# EAGLE board me333-1 (EAGLE 9.6.2)
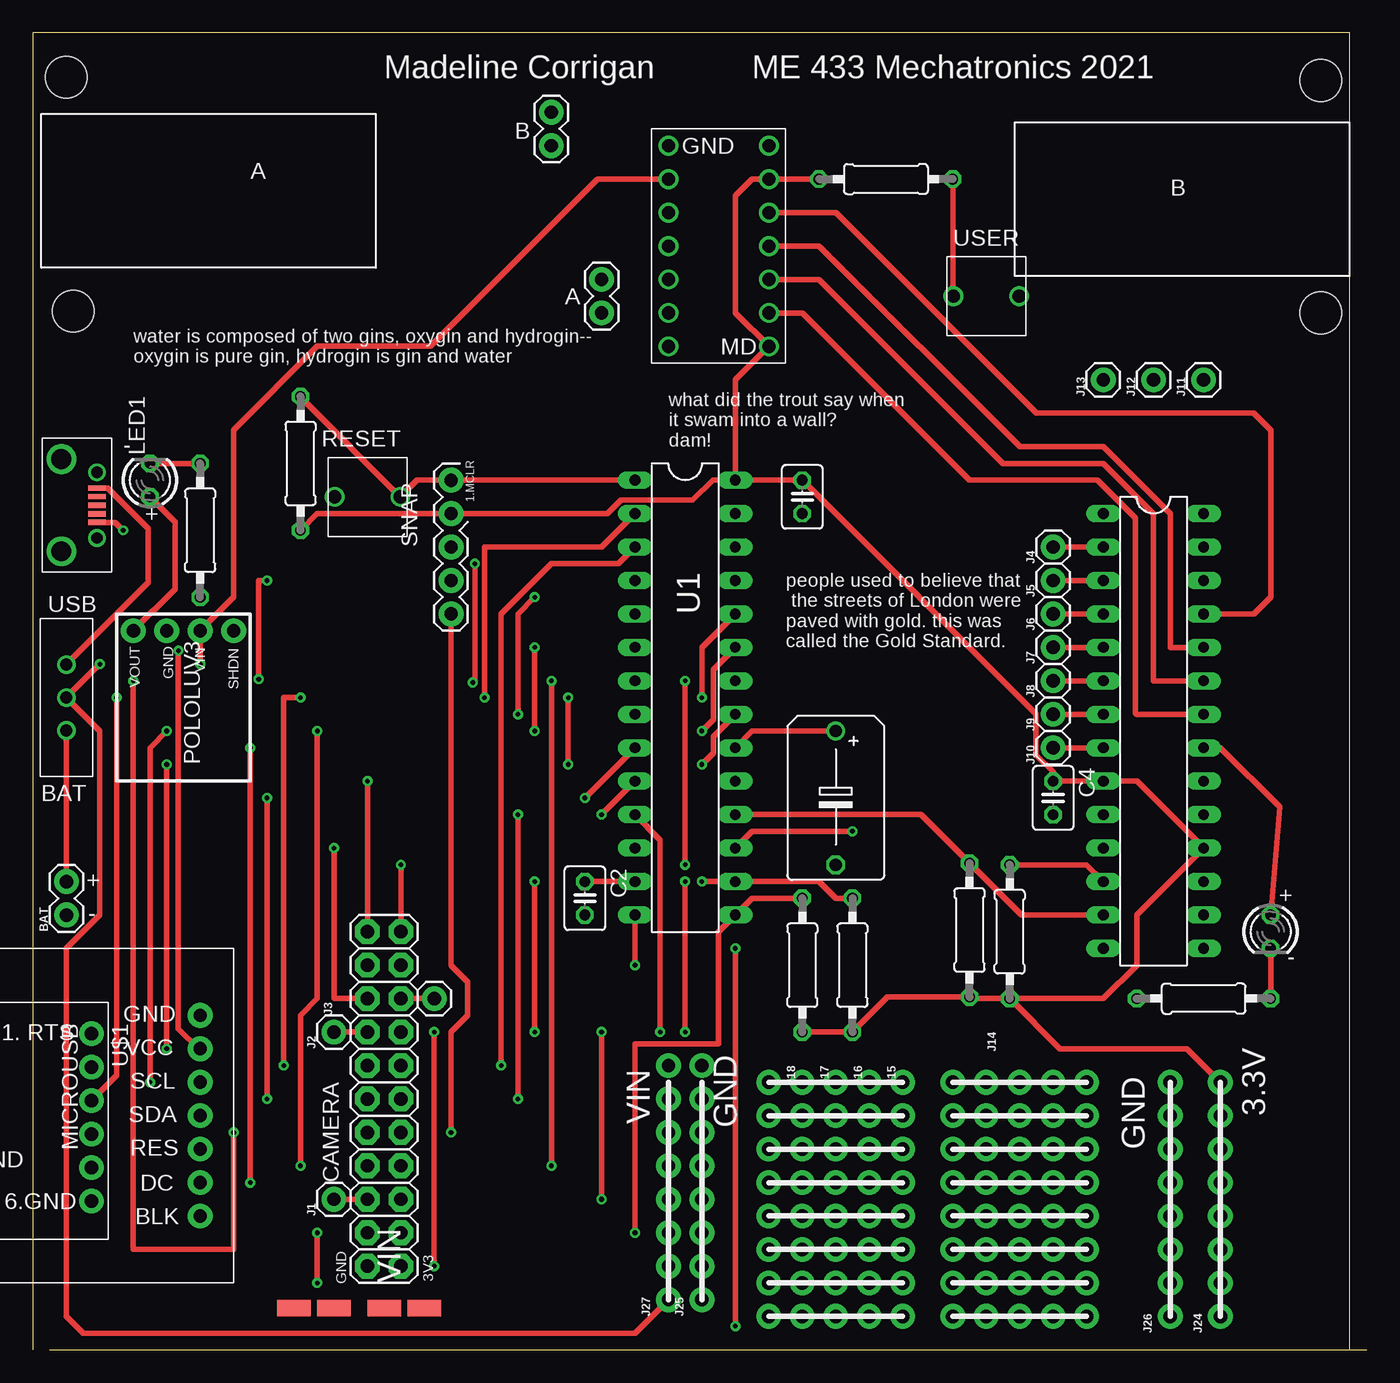
[diagram p0: board, top side]
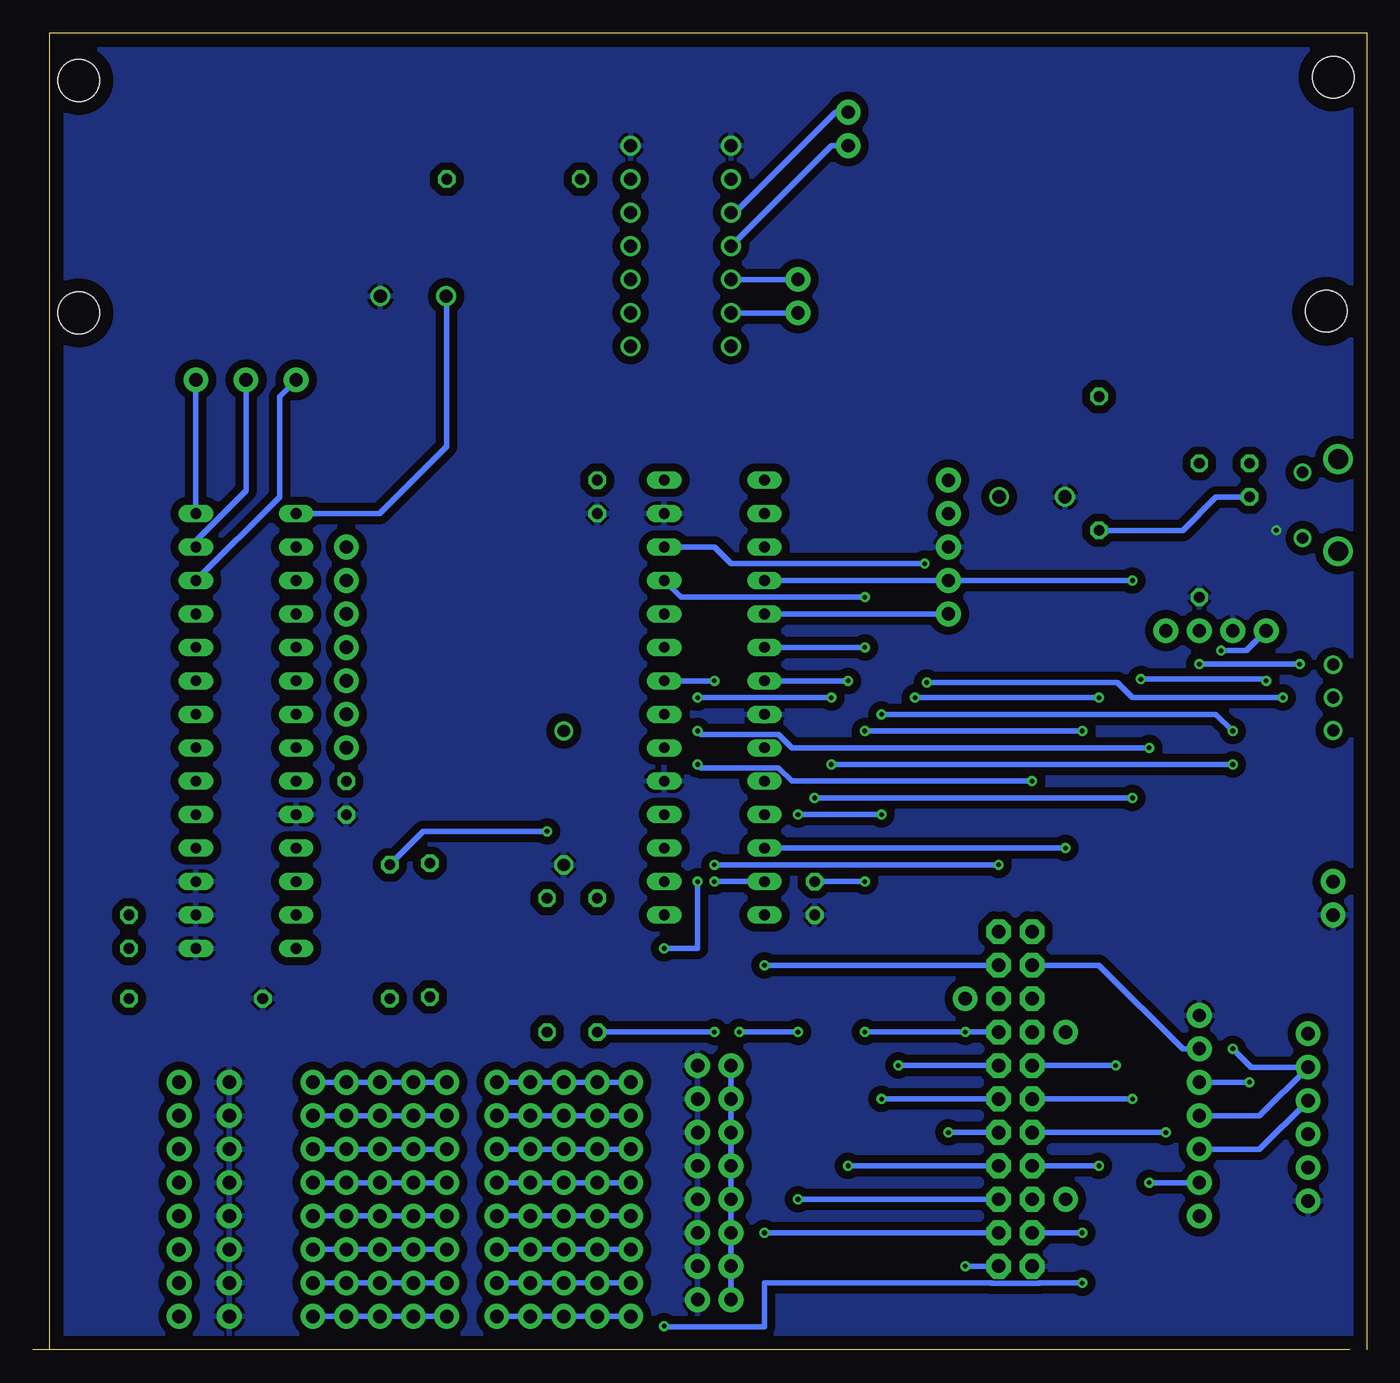
[diagram p1: board, bottom side, seen from below]

Size 101.27 x 100 mm. Coordinates in mm from the lower left corner, seen from the top.
Outline: 100,0 100,100 0,100 0,0
Outline: 1.27,0 101.27,0
Copper layers (1*16): Top 0.035mm / dielectric 0.15mm / Bottom 0.035mm
Design rules "default": minimum track width 6mil, minimum drill 0.35mm, track to track 6mil, track to pad 6mil, pad to pad 6mil, via to via 6mil, smd to smd 6mil, copper to edge 40mil, drill to drill 6mil, minimum pad ring 10mil, minimum via ring 8mil, stop-mask expansion 4mil, vias tented up to drill 0mil, thermal gap 10mil
Holes 3.17 mm at 2.54,96.65 3.05,78.87 97.79,96.39 97.79,78.74

## Footprints (pad centres in the part's own frame; a part is rotated, then mirrored left to right if it is on the bottom)
1X02 = drill 1.016 pad 1.88: 1 0,0; 2 2.54,0
C025-030X050 = drill 0.813 octagon: 1 -1.27,0; 2 1.27,0
B45181C = drill 0.914: + -5.08,0 | drill 0.914 octagon: - 5.08,0
1X01 = drill 1.016 pad 1.88: 1 0,0
1X08 = drill 1.016 pad 1.88: 1 0,0; 2 2.54,0; 3 5.08,0; 4 7.62,0; 5 10.16,0; 6 12.7,0; 7 15.24,0; 8 17.78,0
LED3MM = drill 0.813 octagon: A -1.27,0; K 1.27,0
0207/10 = drill 0.813 octagon: 1 -5.08,0; 2 5.08,0
PUSH = drill 1: 1 -2.5,0; 2 2.5,0
DIL28-3 = drill 0.813 long: 1 -16.51,-3.81; 2 -13.97,-3.81; 3 -11.43,-3.81; 4 -8.89,-3.81; 5 -6.35,-3.81; 6 -3.81,-3.81; 7 -1.27,-3.81; 8 1.27,-3.81; 9 3.81,-3.81; 10 6.35,-3.81; 11 8.89,-3.81; 12 11.43,-3.81; 13 13.97,-3.81; 14 16.51,-3.81; 15 16.51,3.81; 16 13.97,3.81; 17 11.43,3.81; 18 8.89,3.81; 19 6.35,3.81; 20 3.81,3.81; 21 1.27,3.81; 22 -1.27,3.81; 23 -3.81,3.81; 24 -6.35,3.81; 25 -8.89,3.81; 26 -11.43,3.81; 27 -13.97,3.81; 28 -16.51,3.81
MICROUSB = smd 0.4 x 1.35: 1.VBUS -1.3,2.7; 2 -0.65,2.7; 3 0,2.7; 4 0.65,2.7; 5.GND 1.3,2.7 | drill 0.85: P$1 -2.5,2.7; P$7 2.5,2.7 | drill 1.5: P$8 -3.5,0; P$9 3.5,0
SLIDE = drill 0.9: 1 -2.5,0; 2 0,0; 3 2.5,0
POLOLUV3 = drill 1.016 pad 1.88: 1 0,3.81; 2 0,1.27; 3 0,-1.27; 4 0,-3.81
SNAP = drill 1.016 pad 1.88: 1 0,5.08; 2 0,2.54; 3 0,0; 4 0,-2.54; 5 0,-5.08
HBRIDGE-8835 = drill 1: P$1 -3.81,7.62; P$2 -3.81,5.08; P$3 -3.81,2.54; P$4 -3.81,0; P$5 -3.81,-2.54; P$6 -3.81,-5.08; P$7 -3.81,-7.62; P$8 3.81,-7.62; P$9 3.81,-5.08; P$10 3.81,-2.54; P$11 3.81,0; P$12 3.81,2.54; P$13 3.81,5.08; P$14 3.81,7.62
USB-UART-FRIEND = drill 1.016 pad 1.88: 1.RTS -1.27,7.62; 2 -1.27,5.08; 3 -1.27,2.54; 4 -1.27,0; 5 -1.27,-2.54; 6 -1.27,-5.08
LCD-DISP = drill 1.016 pad 1.88: 1 0,7.62; 2 0,5.08; 3 0,2.54; 4 0,0; 5 0,-2.54; 6 0,-5.08; 7 0,-7.62
IO-EXPANDER = drill 0.813 long: 1 -11.43,-2.54; 2 -8.89,-2.54; 3 -6.35,-2.54; 4 -3.81,-2.54; 5 -1.27,-2.54; 6 1.27,-2.54; 7 3.81,-2.54; 8 6.35,-2.54; 9 8.89,-2.54; 10 11.43,-2.54; 11 13.97,-2.54; 12 16.51,-2.54; 13 19.05,-2.54; 14 21.59,-2.54; 15 21.59,5.08; 16 19.05,5.08; 17 16.51,5.08; 18 13.97,5.08; 19 11.43,5.08; 20 8.89,5.08; 21 6.35,5.08; 22 3.81,5.08; 23 1.27,5.08; 24 -1.27,5.08; 25 -3.81,5.08; 26 -6.35,5.08; 27 -8.89,5.08; 28 -11.43,5.08
CAMERA = drill 1.016 pad 1.88 octagon: 1 -1.27,11.43; 2 -1.27,8.89; 3 -1.27,6.35; 4 -1.27,3.81; 5 -1.27,1.27; 6 -1.27,-1.27; 7 -1.27,-3.81; 8 -1.27,-6.35; 9 -1.27,-8.89; 10 -1.27,-11.43; 11 -1.27,-13.97; 12 1.27,-13.97; 13 1.27,-11.43; 14 1.27,-8.89; 15 1.27,-6.35; 16 1.27,-3.81; 17 1.27,-1.27; 18 1.27,1.27; 19 1.27,3.81; 20 1.27,6.35; 21 1.27,8.89; 22 1.27,11.43 | smd 2.54 x 1.27: P$1 -3.048,14.605; P$2 0,14.605; P$3 3.81,14.605; P$4 6.858,14.605

## Placement (x,y rotation side)
A  [1X02]  43.18,78.74 90 top
B  [1X02]  39.37,91.44 90 top
BAT  [1X02]  2.54,33.02 90 top
C1  0.1uF  [C025-030X050]  58.42,64.77 270 top
C2  0.1uF  [C025-030X050]  41.91,34.29 270 top
C3  10uF  [B45181C]  60.96,41.91 270 top
C4  0.1uF  [C025-030X050]  77.47,41.91 270 top
J1  href  [1X01]  22.86,11.43 90 top
J2  pwdn  [1X01]  22.86,24.13 90 top
J3  str  [1X01]  30.48,26.67 90 top
J4  [1X01]  77.47,60.96 90 top
J5  [1X01]  77.47,58.42 90 top
J6  [1X01]  77.47,55.88 90 top
J7  [1X01]  77.47,53.34 90 top
J8  [1X01]  77.47,50.8 90 top
J9  [1X01]  77.47,48.26 90 top
J10  [1X01]  77.47,45.72 90 top
J11  [1X01]  88.9,73.66 90 top
J12  [1X01]  85.09,73.66 90 top
J13  [1X01]  81.28,73.66 90 top
J14  [1X08]  66.04,20.32 270 top
J15  [1X08]  63.5,20.32 270 top
J16  [1X08]  60.96,20.32 270 top
J17  [1X08]  58.42,20.32 270 top
J18  [1X08]  55.88,20.32 270 top
J19  [1X08]  69.85,2.54 90 top
J20  [1X08]  72.39,2.54 90 top
J21  [1X08]  74.93,2.54 90 top
J22  [1X08]  77.47,2.54 90 top
J23  [1X08]  80.01,2.54 90 top
J24  [1X08]  90.17,2.54 90 top
J25  [1X08]  50.8,3.81 90 top
J26  [1X08]  86.36,2.54 90 top
J27  [1X08]  48.26,3.81 90 top
LED1  RED  [LED3MM]  8.89,66.04 90 top
LED2  RED  [LED3MM]  93.98,31.75 270 top
R1  330  [0207/10]  12.7,62.23 90 top
R2  10k  [0207/10]  20.32,67.31 270 top
R3  10k  [0207/10]  74.17,31.75 90 top
R4  10k  [0207/10]  71.12,31.88 90 top
R5  330  [0207/10]  88.9,26.67 0 top
R6  10k  [0207/10]  64.77,88.9 180 top
R7  4.7k  [0207/10]  58.42,29.21 90 top
R8  4.7k  [0207/10]  62.23,29.21 90 top
RESET  PUSH  [PUSH]  25.4,64.77 180 top
U1  PIX32MX170F256B  [DIL28-3]  49.53,49.53 270 top
U$1  MICROUSB  [MICROUSB]  2.16,64.14 270 top
U$2  SLIDE  [SLIDE]  2.54,49.53 270 top
U$3  POLOLUV3  [POLOLUV3]  11.43,54.61 90 top
U$4  SNAP  [SNAP]  31.75,60.96 0 top
U$5  HBRIDGE-8835  [HBRIDGE-8835]  52.07,83.82 0 top
U$6  USB-UART-FRIEND  [USB-UART-FRIEND]  5.71,16.38 0 top
U$7  LCD-DISP  [LCD-DISP]  12.7,17.78 0 top
U$8  IO-EXPANDER  [IO-EXPANDER]  83.82,52.07 270 top
U$9  CAMERA  [CAMERA]  26.67,17.78 180 top
USER  PUSH  [PUSH]  72.39,80.01 0 top

## Library data of the parts
A B BAT J1-J13 LED1 LED2 RESET U1 U$1-U$9 USER = ME433lib
C1-C4 = ME433lib; SPICEPREFIX: C
J14-J27 = ME433lib; PROD_ID: CONN-08438
R1-R8 = ME433lib; SPICEPREFIX: R

## Nets
+3V3: C1.1 C2.1 C4.1 J24.1 J24.2 J24.3 J24.4 J24.5 J24.6 J24.7 J24.8 LED1.A R2.2 R3.1 R4.1 R6.2 R7.1 R8.1 U1.13 U1.28 U$3.1 U$4.2 U$5.P$8 U$5.P$13 U$7.2 U$8.9 U$8.18 U$9.1 U$9.8 U$9.13
+5V: U$1.1.VBUS U$2.1
ADIR: U$5.P$9 U$8.22
APWM: U$5.P$10 U$8.23
B0-PGD-D4: U1.4 U$4.4 U$9.18
B1-PGC-D5: U1.5 U$4.5 U$9.5
B6: R7.2 U1.15 U$9.2
B7: R8.2 U1.16 U$9.21
B8: R3.2 U1.17 U$8.12
B9: R4.2 U1.18 U$8.13
B12: U1.23 U$7.6
B13: U1.24 U$6.2 U$7.4
B14: U1.25 U$7.3
B15: U1.26 U$6.3 U$7.5
BDIR: U$5.P$11 U$8.24
BPWM: U$5.P$12 U$8.25
D0: U1.2 U$9.16
D1: U1.3 U$9.7
D2: U1.9 U$9.17
D3: U1.10 U$9.6
D6: U1.6 U$9.19
D7: U1.7 U$9.4
GND: BAT.1 C1.2 C2.2 C3.- C4.2 J25.1 J25.2 J25.3 J25.4 J25.5 J25.6 J25.7 J25.8 J26.1 J26.2 J26.3 J26.4 J26.5 J26.6 J26.7 J26.8 R1.1 R5.1 RESET.2 U1.8 U1.19 U1.27 U$1.5.GND U$3.2 U$4.3 U$5.P$1 U$5.P$14 U$6.6 U$7.1 U$8.10 U$8.15 U$8.16 U$8.17 U$9.22 USER.2
MCLR: R2.1 RESET.1 U1.1 U$4.1
MCLR1: R6.1 U$8.1 USER.1
N$1: LED1.K R1.2
N$2: C3.+ U1.20
N$3: LED2.K R5.2
N$4: B.2 U$5.P$3
N$5: B.1 U$5.P$4
N$6: LED2.A U$8.21
N$8: A.2 U$5.P$5
N$9: A.1 U$5.P$6
N$10: J3.1 U$9.9
N$11: J2.1 U$9.15
N$12: J1.1 U$9.20
N$13: J4.1 U$8.2
N$14: J5.1 U$8.3
N$15: J6.1 U$8.4
N$16: J7.1 U$8.5
N$17: J8.1 U$8.6
N$18: J9.1 U$8.7
N$19: J10.1 U$8.8
N$20: J11.1 U$8.28
N$21: J12.1 U$8.27
N$22: J13.1 U$8.26
N$23: J14.8 J15.8 J16.8 J17.8 J18.8
N$24: J14.7 J15.7 J16.7 J17.7 J18.7
N$25: J14.6 J15.6 J16.6 J17.6 J18.6
N$26: J14.5 J15.5 J16.5 J17.5 J18.5
N$27: J14.4 J15.4 J16.4 J17.4 J18.4
N$28: J14.3 J15.3 J16.3 J17.3 J18.3
N$29: J14.2 J15.2 J16.2 J17.2 J18.2
N$30: J14.1 J15.1 J16.1 J17.1 J18.1
N$31: J19.8 J20.8 J21.8 J22.8 J23.8
N$32: J19.7 J20.7 J21.7 J22.7 J23.7
N$33: J19.6 J20.6 J21.6 J22.6 J23.6
N$34: J19.5 J20.5 J21.5 J22.5 J23.5
N$35: J19.4 J20.4 J21.4 J22.4 J23.4
N$36: J19.3 J20.3 J21.3 J22.3 J23.3
N$37: J19.2 J20.2 J21.2 J22.2 J23.2
N$38: J19.1 J20.1 J21.1 J22.1 J23.1
RCK: U1.12 U$9.14
RRST: U1.21 U$9.12
V+: BAT.2 U$2.3
VIN: J27.1 J27.2 J27.3 J27.4 J27.5 J27.6 J27.7 J27.8 U$2.2 U$3.3 U$5.P$2
VSY: U1.11 U$9.3
WR: U1.14 U$9.10
WRST: U1.22 U$9.11

## Tracks (layer width: path | path; a pad name or v marks a point on that pad's centre or on a via)
+3V3  (via drill 0.35)
  Top 0.406: R2.2 21.59,63.5 U$4.2 43.62,63.5 44.64,64.52 50.1,64.52 51.63,66.04 U1.28 | U1.28 C1.1 76.17,48.28 76.17,45.18 77.47,43.89 C4.1 U$8.9 83.82,43.18 U$8.18 83.82,33.02 83.82,29.21 81.28,26.67 R3.1 | U1.28 53.34,73.66 U$5.P$8 53.34,78.74 53.34,87.63 54.61,88.9 U$5.P$13 R6.2 | R3.1 77.98,22.86 87.63,22.86 J24.8 J24.7 J24.6 J24.5 J24.4 J24.3 J24.2 J24.1 | R7.1 R8.1 64.9,26.8 R4.1 71.25,26.67 R3.1 | v49.53,24.13 v49.53,35.56 | U$3.1 10.79,57.78 10.79,62.87 LED1.A | v30.48,24.13 v30.48,6.35 | v38.1,24.13 v38.1,35.56 | U$7.2 12.57,22.86 11.05,24.38 v11.05,53.09 | C2.1 U1.13
  Bottom 0.406: R2.2 | R2.2 13.97,62.23 11.43,64.77 LED1.A | R7.1 v49.53,24.13 | U$7.2 13.97,22.86 20.32,29.21 U$9.13 | U$9.8 v30.48,24.13 v38.1,24.13 | v30.48,6.35 U$9.1 | v38.1,35.56 C2.1 | v11.05,53.09 9.14,53.09 U$3.1 | U1.13 v49.53,35.56
+5V
  Top 0.406: U$2.1 8.76,58.25 8.76,62.36 5.68,65.44 U$1.1.VBUS
ADIR
  Top 0.406: U$8.22 83.82,48.26 83.72,48.36 83.72,63.16 80.84,66.04 71.12,66.04 58.42,78.74 U$5.P$9
APWM
  Top 0.406: U$8.23 85.09,50.8 85.09,63.5 81.28,67.31 73.66,67.31 59.69,81.28 U$5.P$10
B0-PGD-D4  (via drill 0.35)
  Top 0.406: v17.14,50.93 17.14,58.42 v17.78,58.42 | v7.62,50.8 7.62,7.62 15.24,7.62 v15.24,16.51
  Bottom 0.406: U1.4 U$4.4 v17.78,58.42 | v17.14,50.93 7.75,50.93 v7.62,50.8 | v15.24,16.51 U$9.18
B1-PGC-D5  (via drill 0.35)
  Top 0.406: v31.75,16.51 31.75,24.13 33.02,25.4 33.02,27.94 31.75,29.21 U$4.5
  Bottom 0.406: U$4.5 U1.5 | v31.75,16.51 U$9.5
B6  (via drill 0.35)
  Top 0.406: R7.2 54.61,34.29 U1.15 52.07,31.75 52.07,23.24 45.72,23.24 v45.72,8.89
  Bottom 0.406: U$9.2 v45.72,8.89
B7  (via drill 0.35)
  Top 0.406: R8.2 60.96,34.29 59.69,35.56 U1.16 v50.8,35.56 | v21.59,8.89 v21.59,5.08 | v53.34,1.8 v53.34,30.48
  Bottom 0.406: U$9.21 v21.59,8.89 | v21.59,5.08 24.84,5.08 24.86,5.05 28.48,5.05 28.5,5.08 45.72,5.08 45.72,1.75 53.29,1.75 v53.34,1.8 | v53.34,30.48 50.8,30.48 v50.8,35.56
B8  (via drill 0.35)
  Top 0.406: R3.2 80.01,36.83 U$8.12 | U1.17 54.61,39.37 v62.23,39.37
  Bottom 0.406: R3.2 71.63,39.37 v62.23,39.37
B9
  Top 0.406: U$8.13 75.06,33.02 R4.2 67.44,40.64 U1.18
B12  (via drill 0.35)
  Top 0.406: v16.51,12.7 v16.51,45.72 | v50.8,46.99 51.66,47.85 51.66,51.66 U1.23
  Bottom 0.406: U$7.6 v16.51,12.7 | v16.51,45.72 43.62,45.72 44.64,46.74 50.55,46.74 v50.8,46.99
B13  (via drill 0.35)
  Top 0.406: U1.24 50.8,53.34 v50.8,49.53 | v40.64,49.53 v40.64,44.45 | v10.16,44.45 v10.16,22.86
  Bottom 0.406: U$7.4 8.13,17.78 U$6.2 8.76,21.46 v10.16,22.86 | v50.8,49.53 v40.64,49.53 | v40.64,44.45 v10.16,44.45
B14  (via drill 0.35)
  Top 0.406: v38.1,57.15 36.83,55.88 v36.83,48.26 | v10.16,46.99 8.89,45.72 v8.89,20.32
  Bottom 0.406: U1.25 52.07,57.15 v38.1,57.15 | v36.83,48.26 11.43,48.26 v10.16,46.99 | v8.89,20.32 U$7.3
B15  (via drill 0.35)
  Top 0.406: v33.56,59.69 33.56,50.67 v33.4,50.67 | v6.35,49.53 6.35,20.83 U$6.3
  Bottom 0.406: U$7.5 8.13,15.24 U$6.3 | U1.26 49.53,60.96 48.26,59.69 v33.56,59.69 | v33.4,50.67 18.92,50.67 17.78,49.53 v6.35,49.53
BDIR
  Top 0.406: U$8.24 86.36,53.34 86.36,63.5 81.28,68.58 74.93,68.58 59.69,83.82 U$5.P$11
BPWM
  Top 0.406: U$8.25 92.71,55.88 93.98,57.15 93.98,69.85 92.71,71.12 76.2,71.12 60.96,86.36 U$5.P$12
D0  (via drill 0.35)
  Top 0.406: U1.2 43.18,60.96 34.29,60.96 v34.29,49.53 | v19.05,21.59 19.05,49.53 v20.32,49.53
  Bottom 0.406: U$9.16 v19.05,21.59 | v34.29,49.53 v20.32,49.53
D1  (via drill 0.35)
  Top 0.406: U1.3 44.45,59.69 39.37,59.69 35.56,55.88 v35.56,21.59
  Bottom 0.406: U$9.7 v35.56,21.59
D2  (via drill 0.35)
  Top 0.406: v17.78,19.05 v17.78,41.91 | v41.91,41.91 U1.9
  Bottom 0.406: U$9.17 v17.78,19.05 | v17.78,41.91 v41.91,41.91
D3  (via drill 0.35)
  Top 0.406: U1.10 v43.18,40.64 | v36.83,40.64 v36.83,19.05
  Bottom 0.406: v43.18,40.64 v36.83,40.64 | v36.83,19.05 U$9.6
D6  (via drill 0.35)
  Top 0.406: v38.1,53.34 v38.1,46.99 | v21.59,46.99 21.59,26.67 20.32,25.4 v20.32,13.97
  Bottom 0.406: U1.6 v38.1,53.34 | v38.1,46.99 v21.59,46.99 | v20.32,13.97 U$9.19
D7  (via drill 0.35)
  Top 0.406: v39.37,13.97 v39.37,50.8
  Bottom 0.406: 44.45,50.8 U1.7 v39.37,50.8 | U$9.4 v39.37,13.97
GND  (via drill 0.35)
  Top 0.406: U$1.5.GND 6.25,62.84 v6.86,62.23
  pour Bottom (isolate 0.61): 0,0 97.79,0 99.06,1.27 99.06,99.06 0,99.06
MCLR
  Top 0.406: U1.1 U$4.1 29.17,66.04 RESET.1 20.32,72.35 R2.1
MCLR1
  Top 0.406: R6.1 69.85,80.05 USER.1
  Bottom 0.406: U$8.1 74.93,63.5 69.85,68.58 69.85,79.97 USER.1
N$1
  Top 0.406: R1.2 LED1.K
N$2
  Top 0.406: U1.20 54.61,46.99 C3.+
N$3
  Top 0.406: LED2.K R5.2
N$4
  Bottom 0.406: B.2 40.34,93.98 47.96,86.36 U$5.P$3
N$5
  Bottom 0.406: U$5.P$4 40.64,91.44 B.1
N$6
  Top 0.406: LED2.A 94.66,41.23 90.17,45.72 U$8.21
N$8
  Bottom 0.406: A.2 U$5.P$5
N$9
  Bottom 0.406: U$5.P$6 A.1
N$10
  Top 0.406: J3.1 U$9.9
N$11
  Top 0.406: J2.1 U$9.15
N$12
  Top 0.406: J1.1 U$9.20
N$13
  Top 0.406: J4.1 U$8.2
N$14
  Top 0.406: U$8.3 J5.1
N$15
  Top 0.406: J6.1 U$8.4
N$16
  Top 0.406: U$8.5 J7.1
N$17
  Top 0.406: J8.1 U$8.6
N$18
  Top 0.406: U$8.7 J9.1
N$19
  Top 0.406: J10.1 U$8.8
N$20
  Bottom 0.406: J11.1 U$8.28
N$21
  Bottom 0.406: J12.1 85.09,65.26 85.06,65.24 88.9,61.4 U$8.27
N$22
  Bottom 0.406: J13.1 82.55,72.39 82.55,64.77 U$8.26
N$23
  Bottom 0.406: J18.8 J17.8 J16.8 J15.8 J14.8
N$24
  Bottom 0.406: J18.7 J17.7 J16.7 J15.7 J14.7
N$25
  Bottom 0.406: J14.6 J15.6 J16.6 J17.6 J18.6
N$26
  Bottom 0.406: J18.5 J17.5 J16.5 J15.5 J14.5
N$27
  Bottom 0.406: J14.4 J15.4 J16.4 J17.4 J18.4
N$28
  Bottom 0.406: J18.3 J17.3 J16.3 J15.3 J14.3
N$29
  Bottom 0.406: J14.2 J15.2 J16.2 J17.2 J18.2
N$30
  Bottom 0.406: J18.1 J17.1 J16.1 J15.1 J14.1
N$31
  Bottom 0.406: J23.8 J22.8 J21.8 J20.8 J19.8
N$32
  Bottom 0.406: J19.7 J20.7 J21.7 J22.7 J23.7
N$33
  Bottom 0.406: J23.6 J22.6 J21.6 J20.6 J19.6
N$34
  Bottom 0.406: J19.5 J20.5 J21.5 J22.5 J23.5
N$35
  Bottom 0.406: J23.4 J22.4 J21.4 J20.4 J19.4
N$36
  Bottom 0.406: J19.3 J20.3 J21.3 J22.3 J23.3
N$37
  Bottom 0.406: J23.2 J22.2 J21.2 J20.2 J19.2
N$38
  Bottom 0.406: J19.1 J20.1 J21.1 J22.1 J23.1
RCK  (via drill 0.35)
  Top 0.406: U$9.14 22.86,26.67 v22.86,38.1
  Bottom 0.406: v22.86,38.1 U1.12
RRST  (via drill 0.35)
  Top 0.406: U$9.12 v25.4,43.18 | v50.8,44.45 51.66,45.31 51.66,46.58 U1.21
  Bottom 0.406: v25.4,43.18 43.62,43.18 44.64,44.2 50.55,44.2 v50.8,44.45
V+
  Top 0.406: BAT.2 U$2.3
VIN  (via drill 0.35)
  Top 0.406: v5.08,52.07 U$2.2 5.08,46.99 5.08,33.02 2.54,30.48 2.54,2.54 3.81,1.27 45.72,1.27 J27.1 | v12.7,52.07 U$3.3 15.24,57.15 15.24,69.85 21.59,76.2 30.18,76.2 42.88,88.9 U$5.P$2
  Bottom 0.406: v12.7,52.07 v5.08,52.07 | J27.8 J27.7 J27.6 J27.5 J27.4 J27.3 J27.2 J27.1
VSY  (via drill 0.35)
  Top 0.406: v43.18,11.43 v43.18,24.13 | v47.62,24.13 47.62,38.73 U1.11
  Bottom 0.406: U$9.3 v43.18,11.43 | v43.18,24.13 v47.62,24.13
WR  (via drill 0.35)
  Top 0.406: v45.72,29.21 U1.14
  Bottom 0.406: U$9.10 v45.72,29.21
WRST  (via drill 0.35)
  Top 0.406: U$9.11 v27.94,36.83 | v49.53,36.83 v49.53,50.8
  Bottom 0.406: v27.94,36.83 v49.53,36.83 | v49.53,50.8 U1.22

## Text on the board
tPlace: Madeline Corrigan | ME 433 Mechatronics 2021 | B | A | B | A | water is composed of two gins, oxygin and hydrogin-- / oxygin is pure gin, hydrogin is gin and water | what did the trout say when / it swam into a wall? / dam! | - | + | USB | people used to believe that / the streets of London were / paved with gold. this was / called the Gold Standard. | BAT | + | + | - | - | 3.3V | VIN | GND | GND | VIN